# Altium PCB CurrentShuntAmpSquare.PcbDoc
Units mil, origin at the board's own origin, x right, y up, seen from the top; angles counter-clockwise.
Board outline 485 x 570 mil, 2 copper layers (Top Layer, Bottom Layer); 5 components, 5 nets, 19 pads, 0 vias.
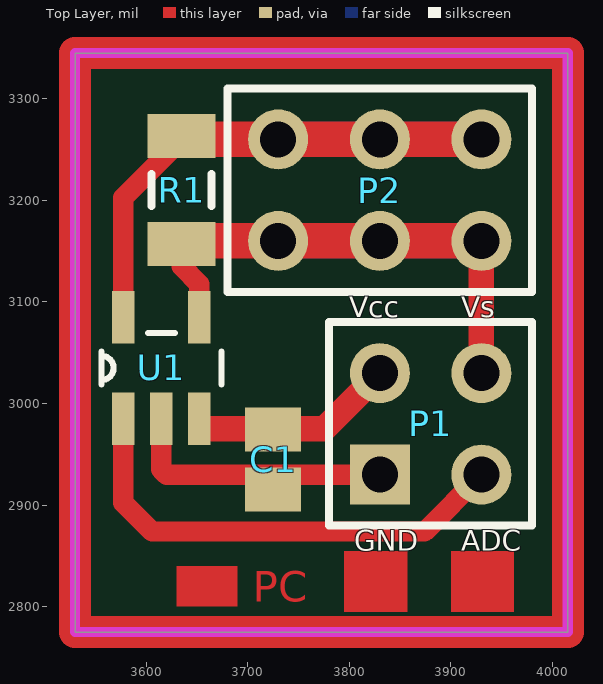
[diagram p0: Top Layer view]
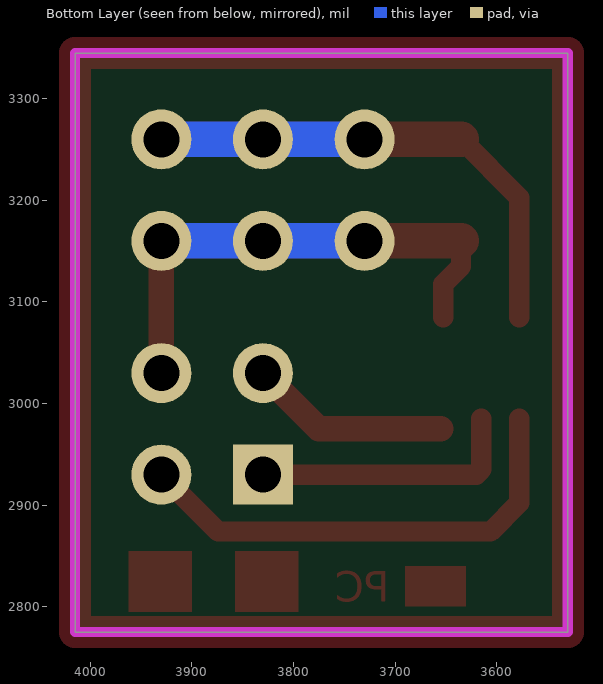
[diagram p1: Bottom Layer view, seen from below]
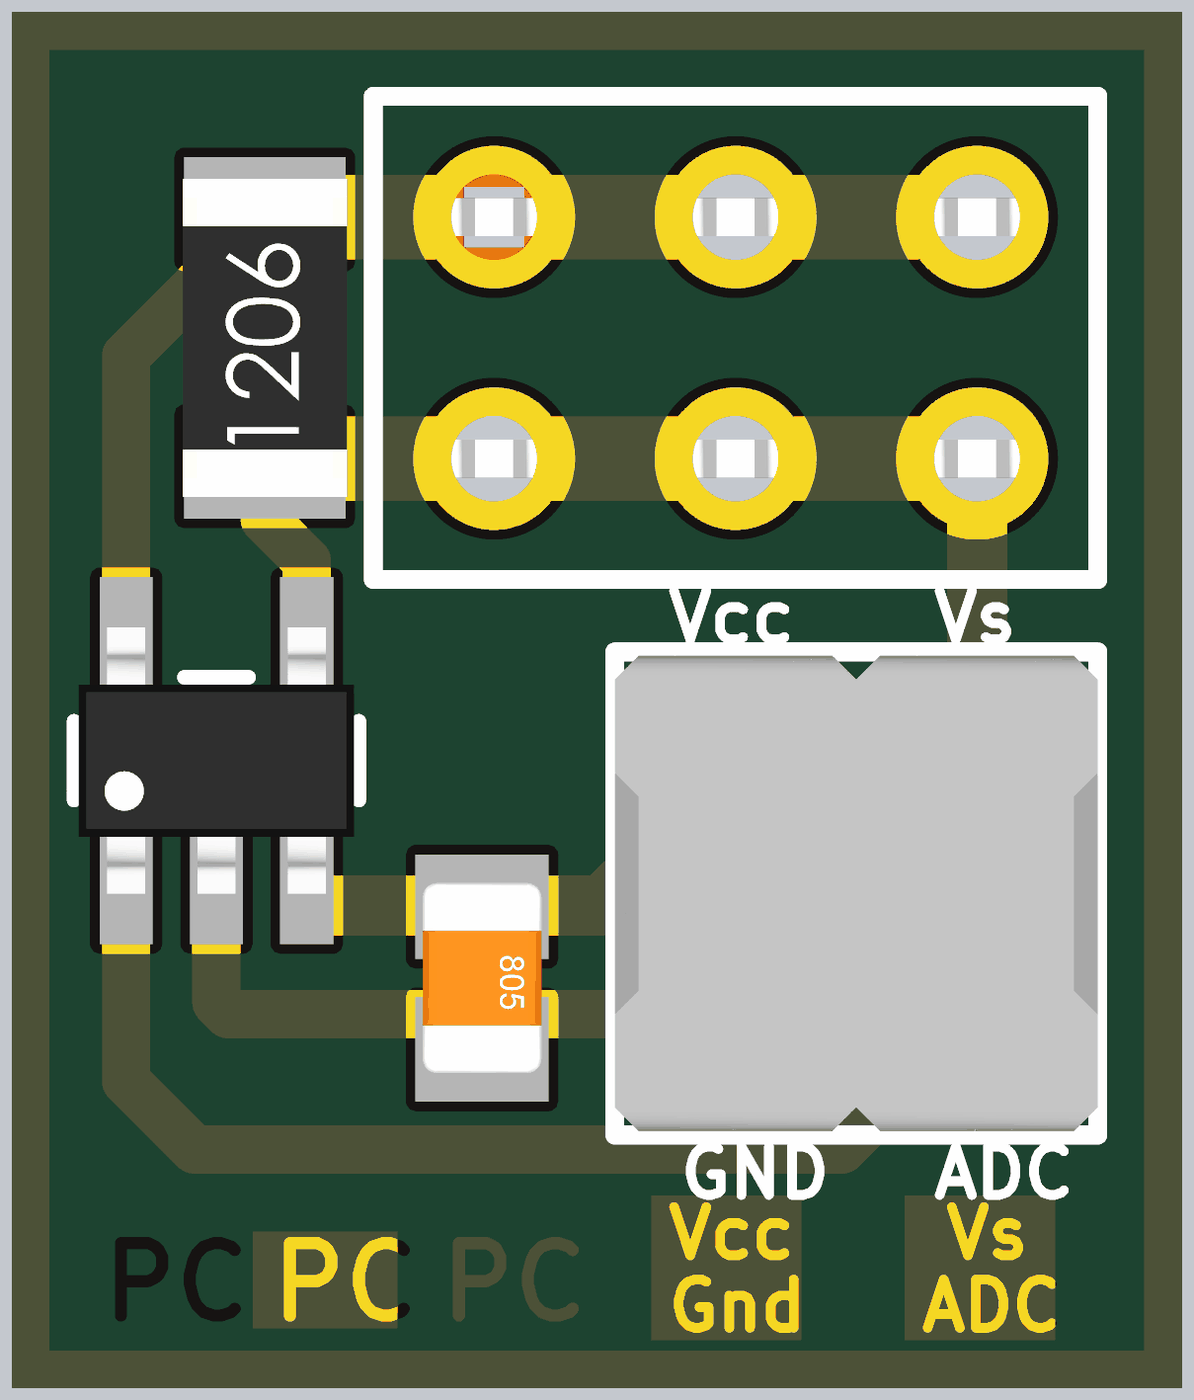
[diagram p2: 3D render of the assembled board from above, using the file's embedded part models]

## Layer stack, top to bottom
Top Solder: solder mask 0.4, Solder Resist, Dk 3.5
Top Layer: signal copper 1.4
Dielectric 1: dielectric 12.6, FR-4, Dk 4.8
Bottom Layer: signal copper 1.4
Bottom Solder: solder mask 0.4, Solder Resist, Dk 3.5

## Board outline
3530,2775 4015,2775 4015,3345 3530,3345

## Design rules (kind name [scope] priority, off if disabled: settings)
Clearance [All] p1: gap=10
PolygonConnect [All] p1: connectstyle=Relief reliefconductorwidth=10 reliefentries=4 polygonreliefangle="90 Angle" airgapwidth=10
RoutingVias [All] p1: holewidth=28 width=50 viastyle="Through Hole" minholewidth=28 minwidth=50 maxholewidth=28 maxwidth=50
SolderMaskExpansion [All] p1: expansion=4
Width [All] p1: maxlimit=40 minlimit=10 preferedwidth=10 minimp=50.000000 maximp=50.000000 favimp=50.000000
30 further rules are at their usual default settings.

## Components (designator, comment, footprint, x,y, rotation, side; value= is the part's Value field where it differs from the comment)
C1 "Cap" C0805 3725,2945 r270 top
P1 "Header 2X2" HDR2X2 3930,2930 r90 top
P2 "Header 3X2" HDR2X3 3730,3160 r0 top
R1 "Res1" C1206 3635,3210 r90 top
U1 "MAX4376FAUK+" 21-0057F 3615,3035 r90 top

## Footprints (in the part's own frame and the unit in brackets; to place one, negate y for a bottom-side part, rotate by r counter-clockwise, add the part's x,y. Pads: shape width x height; smd on the part's side, far side on the other; paste and mask are expansions set on the pad)
21-0057F [mil]
  rect 52x22 smd: 1(-50,37.4) 2(-50,0) 3(-50,-37.4) 4(50,-37.4) 5(50,37.4)
  silkscreen extent -16,-59 34,59, body extent -55,-57 55,57, height 57
C0805 [mm] "Chip Capacitor, Body 2.0x1.3mm, IPC High Density"
  rect 1.1x1.4 smd: 1(-0.75,0) 2(0.75,0)
  body extent -1,-0.62 1,0.63, height 0.78
C1206 [mm] "Chip Capacitor, Body 3.2x1.6mm, IPC High Density"
  rect 1.1x1.7 smd: 1(-1.35,0) 2(1.35,0)
  silkscreen extent -0.4,-0.75 0.4,0.75, body extent -1.67,-0.86 1.68,0.87, height 0.85
HDR2X2 [mm] "Connector; Header; 2x2 Position"
  round 1.5 hole 0.9: 1(0,0) 3(2.54,0) 4(2.54,2.54)
  rect 1.5x1.5 hole 0.9: 2(0,2.54)
  silkscreen extent -1.27,-1.27 3.81,3.81, body extent -1.23,-1.27 3.77,3.81, height 8.6
HDR2X3 [mm] "Connector; Header; 3x2 Position"
  round 1.5 hole 0.9: 1(0,0) 2(0,2.54) 3(2.54,0) 4(2.54,2.54) 5(5.08,0) 6(5.08,2.54)
  silkscreen extent -1.27,-1.27 6.35,3.81, body extent -1.39,-1.23 6.48,3.77, height 2.79

## Part data
C1: library part "Cap Semi", "Capacitor (Semiconductor SIM Model)"
P1: "Header, 2-Pin, Dual row"
P2: "Header, 3-Pin, Dual row"
R1: "Resistor"
U1: "Imported"

## Nets (pads, with @x,y where several pads share a name; then routed paths per layer and width w, separated by ;. In a path a pad name is that pad's centre, name@x,y a point inside that pad or via, vN(x,y) a via of type N, cw(c..) or ccw(c..) an arc to the next point about the centre after c; other vN are vias at no path point)
ADC: P1.1 U1.1 | length 470
  Top Layer w20: U1.1 3577.6,2902.4 3606,2874 3874,2874 P1.1
GND: C1.2 P1.2 U1.2 | length 267.1
  Top Layer w20: U1.2 3615,2935 3620,2930 P1.2
NetP2_2: P2.2 P2.4 P2.6 R1.2 U1.5 | length 693.8
  Top Layer w20: U1.5 3577.6,3202.6 R1.2@3635,3260
  Top Layer w35: R1.2@3635,3260 P2.2 P2.4 P2.6
  Bottom Layer w35: P2.2 P2.4 P2.6
VCC: C1.1 P1.4 U1.3 | length 197.8
  Top Layer w25: U1.3@3655,2975 3775,2975 P1.4
VSENSE: P1.3 P2.1 P2.3 P2.5 R1.1 U1.4 | length 704.1
  Top Layer w20: R1.1 3635,3135 3652.4,3117.6 U1.4
  Top Layer w25: P1.3 P2.5
  Top Layer w35: R1.1@3635,3160 P2.1 P2.3 P2.5
  Bottom Layer w35: P2.1 P2.3 P2.5
copper on no net: | length 2110
  Top Layer w31.5: 3530,2775 3530,3345 4015,3345 4015,2775 3530,2775

## Keep-outs
Keep-Out Layer:
  the board outline again, w10

## Other copper
Top Layer:
  rectangle: 3630,2800 3689.98,2839.99
  rectangle: 3900,2795 3962.32,2855
  rectangle: 3795,2795 3857.32,2855
  text "PC" at 3705,2805 h30

## Silkscreen, mask and mechanical layers (free items; w line width, h text height)
Top Overlay:
  text "Vcc" at 3800,3085 h20
  text "Vs" at 3910,3085 h20
  text "GND" at 3805,2855 h20
  text "ADC" at 3910,2855 h20
Top Solder:
  text "Vcc" at 3800,2830 h20
  text "Vs" at 3915,2830 h20
  text "PC" at 3565,2805 h30
  text "PC" at 3635,2805 h30
  text "Gnd" at 3800,2800 h20
  text "ADC" at 3905,2800 h20